# Altium PCB PCB1.pcbdoc
Units mil, origin at the board's own origin, x right, y up, seen from the top; angles counter-clockwise.
Board outline 1695 x 2542.13 mil, 2 copper layers (Top Layer, Bottom Layer); 9 components, 14 nets, 84 pads, 29 vias.
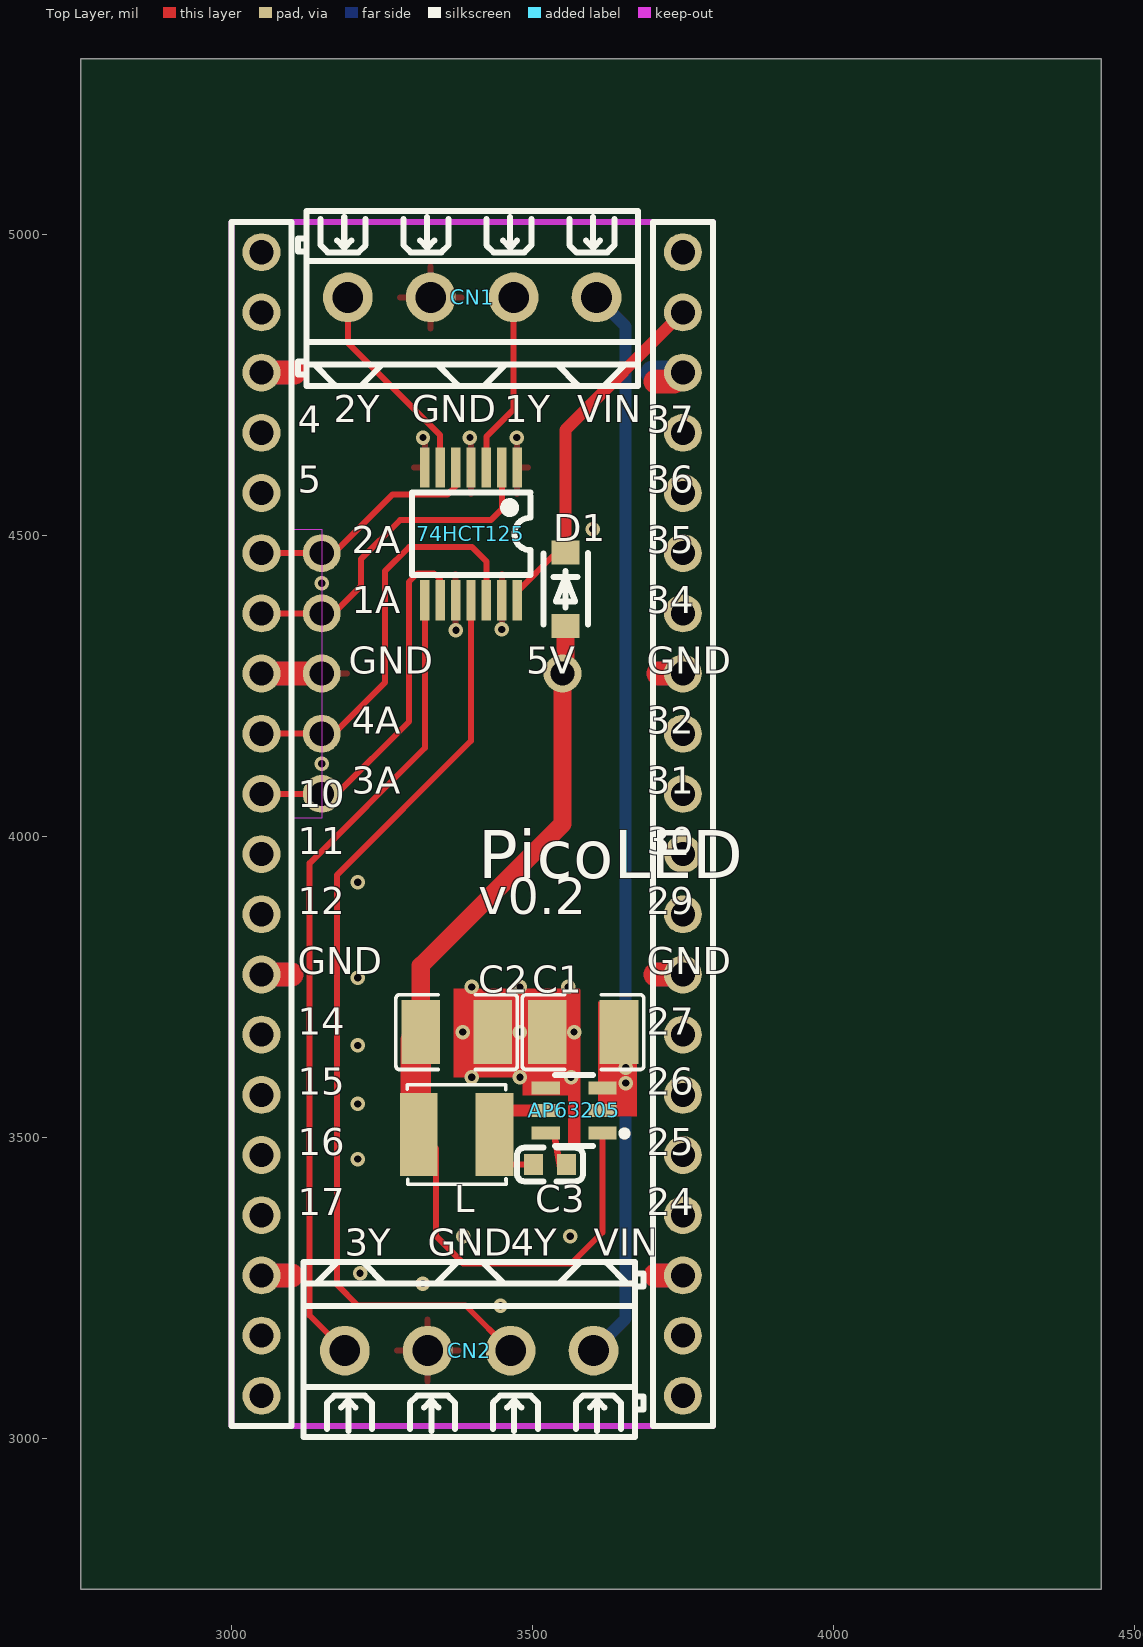
[diagram p0: Top Layer view]
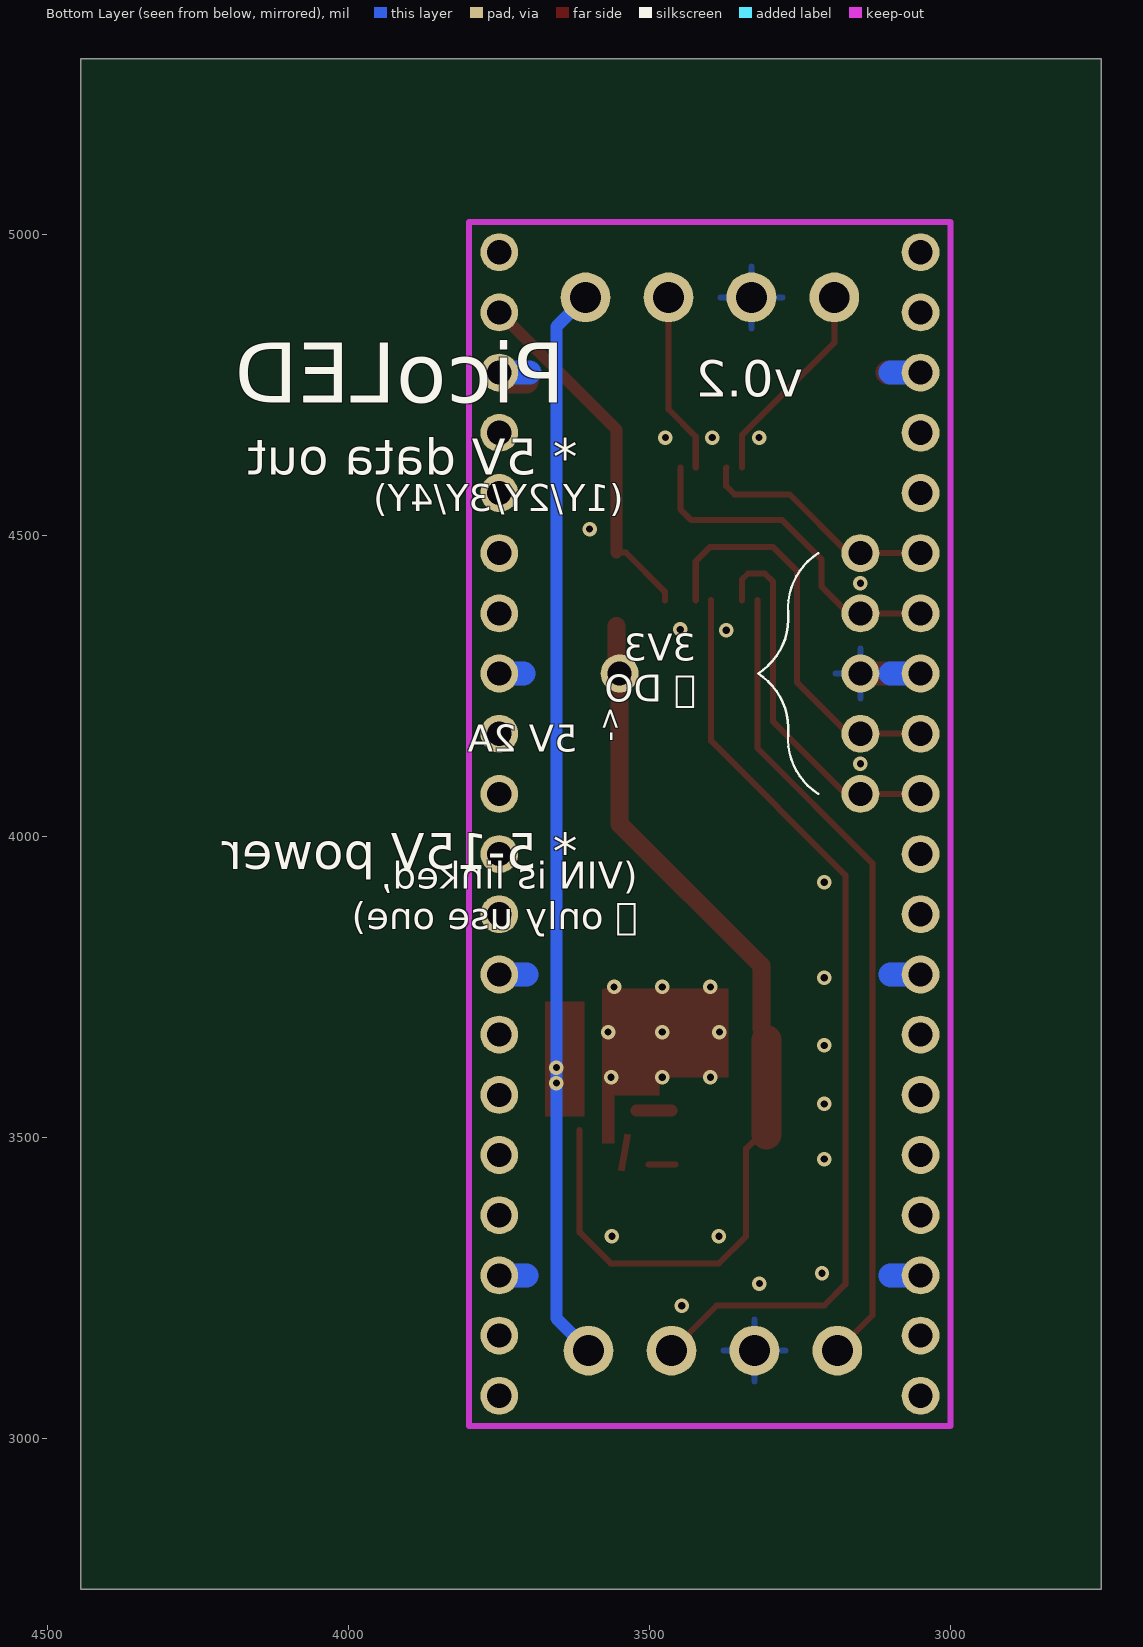
[diagram p1: Bottom Layer view, seen from below]

## Layer stack, top to bottom
Top Layer: signal copper (thickness not stored)
Dielectric: dielectric 12.6, FR-4, Dk 4.8
Bottom Layer: signal copper (thickness not stored)

## Board outline
4445,2750 2750,2750 2750,5292.13 4445,5292.13

## Design rules (kind name [scope] priority, off if disabled: settings)
BoardOutlineClearance copperThickness1oz [All] p0: genericclearance=10 ignorepadtopadclearanceinfootprint=FALSE except(0: Arc-SplitContinuation Track-SplitContinuation SMDPad-SplitContinuation THPad-SplitContinuation Via-SplitContinuation Fill-SplitContinuation Poly-SplitContinuation Region-SplitContinuation Text-SplitContinuation; 6: Track-CutoutEdge SMDPad-CutoutEdge THPad-CutoutEdge Via-CutoutEdge Region-CutoutEdge; 11.8: Track-OutlineEdge SMDPad-OutlineEdge THPad-OutlineEdge Via-OutlineEdge Fill-OutlineEdge Region-OutlineEdge Poly-OutlineEdge Text-OutlineEdge Fill-CutoutEdge)
BoardOutlineClearance copperThickness2oz [All] p0: genericclearance=10 ignorepadtopadclearanceinfootprint=FALSE except(0: Arc-SplitContinuation Track-SplitContinuation SMDPad-SplitContinuation THPad-SplitContinuation Via-SplitContinuation Fill-SplitContinuation Poly-SplitContinuation Region-SplitContinuation Text-SplitContinuation; 6: Track-CutoutEdge SMDPad-CutoutEdge THPad-CutoutEdge Via-CutoutEdge Region-CutoutEdge; 11.8: Track-OutlineEdge SMDPad-OutlineEdge THPad-OutlineEdge Via-OutlineEdge Fill-OutlineEdge Region-OutlineEdge Poly-OutlineEdge Text-OutlineEdge Fill-CutoutEdge)
Clearance copperThickness1oz [(InNet('GND') OR InNet('+5V') OR InNet('$1N476') OR InNet('1A') OR InNet('2A') OR InNet('1Y') OR InNet('2Y') OR InNet('3Y') OR InNet('3A') OR InNet('4Y') OR InNet('4A') OR InNet('SW') OR InNet('VIN') OR InNet('VSYS'))] p1: gap=7 ignorepadtopadclearanceinfootprint=FALSE except(4: Track-Track; 6: Track-SMDPad SMDPad-SMDPad Track-THPad SMDPad-THPad THPad-THPad Track-Via SMDPad-Via THPad-Via Via-Via SMDPad-Fill THPad-Fill Via-Fill Fill-Fill Track-Region SMDPad-Region THPad-Region Via-Region Region-Region Track-Poly SMDPad-Poly THPad-Poly Via-Poly Fill-Poly Region-Poly Poly-Poly Track-Text SMDPad-Text THPad-Text Via-Text Fill-Text Region-Text Poly-Text Text-Text; 6.9: Track-Hole SMDPad-Hole THPad-Hole Via-Hole Fill-Hole Region-Hole Poly-Hole Text-Hole Sheet-Hole; 11.8: Track-Fill Fill-Region Track-Sheet SMDPad-Sheet THPad-Sheet Via-Sheet Fill-Sheet Region-Sheet Poly-Sheet Text-Sheet)
Clearance copperThickness2oz [All] p1: gap=7 ignorepadtopadclearanceinfootprint=FALSE except(6: Track-SMDPad SMDPad-SMDPad Track-THPad SMDPad-THPad THPad-THPad Track-Via SMDPad-Via THPad-Via Via-Via SMDPad-Fill THPad-Fill Via-Fill Fill-Fill Track-Region SMDPad-Region THPad-Region Via-Region Region-Region Track-Poly SMDPad-Poly THPad-Poly Via-Poly Fill-Poly Region-Poly Poly-Poly Track-Text SMDPad-Text THPad-Text Via-Text Fill-Text Region-Text Poly-Text Text-Text; 6.9: Track-Hole SMDPad-Hole THPad-Hole Via-Hole Fill-Hole Region-Hole Poly-Hole Text-Hole Sheet-Hole; 8: Track-Track; 11.8: Track-Fill Fill-Region Track-Sheet SMDPad-Sheet THPad-Sheet Via-Sheet Fill-Sheet Region-Sheet Poly-Sheet Text-Sheet)
DiffPairsRouting differentialPair [All] p1: maxuncoupledlength=10 minlimit=6 maxlimit=6 mostfreqgap=6 toplayer_minwidth=5 toplayer_prefwidth=10 toplayer_maxwidth=100 bottomlayer_minwidth=5 bottomlayer_prefwidth=10 bottomlayer_maxwidth=100
PasteMaskExpansion pasteMaskExpansion [All] p1: expansion=0
PlaneConnect innerPlane [All] p1: planeconnectstyle=Relief reliefexpansion=20 reliefentries=4 reliefconductorwidth=10 reliefairgap=10
PolygonConnect copperRegion [All] p1: connectstyle=Relief reliefentries=4 reliefconductorwidth=10 polygonreliefangle="90 Angle" airgapwidth=10
RoutingVias viaSize [All] p1: viastyle="Through Hole" holewidth=12.0078 minholewidth=11.811 maxholewidth=248.0314 width=24.0158 minwidth=19.685 maxwidth=393.7008
SolderMaskExpansion solderMaskExpansion [All] p1: useseparateexpansions=TRUE expansion=2 expansionbottom=2
Width copperThickness1oz [All] p1: maxlimit=100 minlimit=5 preferedwidth=10
Width copperThickness2oz [All] p1: maxlimit=100 minlimit=8 preferedwidth=10

## Components (designator, comment, footprint, x,y, rotation, side; value= is the part's Value field where it differs from the comment)
74HCT125 "={Manufacturer Part}" TSSOP-14_L5.0-W4.4-P0.65-LS6.4-BL 3398,4503.06 r180 top
AP63205 "={Manufacturer Part}" TSOT-23-6_L2.9-W1.6-P0.95-LS2.8-BL 3569.22,3545.29 r90 top
C1 "={Value}" C1210 3584.22,3675.29 r0 top
C2 "={Value}" C1210 3374.22,3675.29 r180 top
C3 "={Value}" C0603 3529.22,3455.29 r0 top
CN1 "" CONN-TH_DB125-3.5-4P-GN 3400,4896.06 r180 top
CN2 "" CONN-TH_DB125-3.5-4P-GN 3395,3146.06 r0 top
D1 "" SOD-123F_L2.8-W1.8-LS3.7-RD 3555,4411.06 r270 top
L "={Value}" IND-SMD_L4.0-W4.0 3374.22,3505.29 r180 top

## Footprints (in the part's own frame and the unit in brackets; to place one, negate y for a bottom-side part, rotate by r counter-clockwise, add the part's x,y. Pads: shape width x height; smd on the part's side, far side on the other; paste and mask are expansions set on the pad)
C0603 [mm]
  rect 0.8x0.9 smd: 1(-0.7,0) 2(0.7,0)
  silkscreen extent -1.39,-0.71 1.39,0.71
C1210 [mm]
  rect 1.635x2.7 smd: 1(-1.517,0) 2(1.517,0)
  silkscreen extent -2.56,-1.58 2.56,1.58
CONN-TH_DB125-3.5-4P-GN [mm]
  round 2.1 hole 1.3: 1(-5.25,0) 2(-1.75,0) 3(1.75,0) 4(5.25,0)
  silkscreen extent -7,-3.65 7.35,3.75
IND-SMD_L4.0-W4.0 [mm]
  rect 1.6x3.5 smd: 1(-1.6,0) 2(1.6,0)
  silkscreen extent -2.08,-2.1 2.08,2.1
SOD-123F_L2.8-W1.8-LS3.7-RD [mm]
  rect 1x1.2 smd: 1(-1.55,0) 2(1.55,0)
  silkscreen extent -1.52,-0.93 1.49,0.95
TSOT-23-6_L2.9-W1.6-P0.95-LS2.8-BL [mm]
  rect 0.55x1.2 smd: 1(-0.95,-1.2) 2(0,-1.2) 3(0.95,-1.2) 4(0.95,1.2) 5(0,1.2) 6(-0.95,1.2)
  silkscreen extent -1.5,-2.25 1.5,0.8
TSSOP-14_L5.0-W4.4-P0.65-LS6.4-BL [mm]
  rect 0.4x1.7 smd: 1(-1.95,-2.8) 2(-1.3,-2.8) 3(-0.65,-2.8) 4(0,-2.8) 5(0.65,-2.8) 6(1.3,-2.8) 7(1.95,-2.8) 8(1.95,2.8) 9(1.3,2.8) 10(0.65,2.8) 11(0,2.8) 12(-0.65,2.8) 13(-1.3,2.8) 14(-1.95,2.8)
  silkscreen extent -2.51,-1.74 2.5,1.74

## Free pads (board coordinates)
  round 63 hole 40: 1(3050,4971.06) 1(3150,4071.06) 1(3150,4171.06) 1(3150,4271.06) 1(3150,4371.06) 1(3150,4471.06) 2(3050,4871.06) 3(3050,4771.06) 4(3050,4671.06) 5(3050,4571.06) 5V(3550,4271.06) 6(3050,4471.06) 7(3050,4371.06) 8(3050,4271.06) 9(3050,4171.06) 10(3050,4071.06) 11(3050,3971.06) 12(3050,3871.06) 13(3050,3771.06) 14(3050,3671.06) 15(3050,3571.06) 16(3050,3471.06) 17(3050,3371.06) 18(3050,3271.06) 19(3050,3171.06) 20(3050,3071.06) 20(3750,3071.06) 21(3750,3171.06) 23(3750,3271.06) 24(3750,3371.06) 25(3750,3471.06) 26(3750,3571.06) 27(3750,3671.06) 28(3750,3771.06) 29(3750,3871.06) 30(3750,3971.06) 31(3750,4071.06) 32(3750,4171.06) 33(3750,4271.06) 34(3750,4371.06) 35(3750,4471.06) 36(3750,4571.06) 37(3750,4671.06) 38(3750,4771.06) 39(3750,4871.06) 40(3750,4971.06)

## Via types
v1: diameter 24.02, hole 12.01, Top Layer to Bottom Layer, 29 vias

## Nets (pads, with @x,y where several pads share a name; then routed paths per layer and width w, separated by ;. In a path a pad name is that pad's centre, name@x,y a point inside that pad or via, vN(x,y) a via of type N, cw(c..) or ccw(c..) an arc to the next point about the centre after c; other vN are vias at no path point)
1A: 74HCT125.2 pad.1@3150,4371.06 pad.7 | length 546.3
  Top Layer w10: pad.7 pad.1@3150,4371.06 ; pad.1@3170,4371.06 3215,4416.06 3215,4461.06 3280,4526.06 3431,4526.06 3449.18,4544.24 74HCT125.2
1Y: 74HCT125.3 CN1.2 | length 301.5
  Top Layer w10: 74HCT125.3 3423.59,4664.65 3468.9,4709.96 CN1.2
2A: 74HCT125.5 pad.1@3150,4471.06 pad.6 | length 380.1
  Top Layer w10: pad.6 pad.1@3150,4471.06 ; pad.1@3170,4471.06 3267.79,4568.85 3359.24,4568.85 3373,4582.61 3373,4612.71 74HCT125.5
2Y: 74HCT125.6 CN1.4 | length 346.3
  Top Layer w10: CN1.4 3193.31,4820.56 3346.82,4667.05 74HCT125.6
3A: 74HCT125.9 pad.1@3150,4071.06 pad.10 | length 603.2
  Top Layer w10: pad.10 pad.1@3150,4071.06 ; pad.1@3170,4071.06 3175,4071.06 3295,4191.06 3295,4423.47 3308.81,4437.27 3336.82,4437.27 3346.82,4427.27 74HCT125.9
3Y: 74HCT125.8 CN2.1 | length 1350.1
  Top Layer w10: CN2.1 3130,3204.37 3130,3956.06 3321.23,4147.29 74HCT125.8
4A: 74HCT125.12 pad.1@3150,4171.06 pad.9 | length 664.8
  Top Layer w10: pad.9 pad.1@3150,4171.06 ; pad.1@3170,4171.06 3255,4256.06 3255,4441.06 3295,4481.06 3400,4481.06 3423.59,4457.47 74HCT125.12
4Y: 74HCT125.11 CN2.3 | length 1563.6
  Top Layer w10: 74HCT125.11 3398,4159.06 3175,3936.06 3175,3256.06 3210,3221.06 3388.9,3221.06 CN2.3
$1N476: AP63205.6 C3.2
+5V: AP63205.1 C2.2 D1.2 L.2 pad.5V | length 1599.3
  Top Layer w10: L.2@3311.23,3510.29 3340,3481.52 3340,3336.06 3385,3291.06 3565,3291.06 3616.47,3342.53 AP63205.1@3616.47,3512.89
  Top Layer w30: C2.2@3314.48,3680.29 3314.48,3785.55 3550,4021.06 pad.5V 3555,4276.06 D1.2
  Top Layer w50: L.2@3306.23,3505.29 C2.2@3306.23,3662.3
GND: 74HCT125.1 74HCT125.4 74HCT125.7 74HCT125.10 74HCT125.13 AP63205.4 C1.1 C2.1 CN1.3 CN2.2 pad.1@3150,4271.06 pad.3 pad.8 pad.13 pad.18 pad.23 pad.28 pad.33 pad.38 | length 815.8
  Top Layer w40: pad.18 3100,3271.06 ; pad.13 3100,3771.06 ; pad.8 pad.1@3150,4271.06 ; pad.3 3105,4771.06 ; 3705,3271.06 pad.23 ; 3705,3771.06 pad.28 ; 3705,4756.06 3735,4756.06 pad.38 ; 3710,4271.06 pad.33
  Bottom Layer w40: pad.18 3100,3271.06 ; pad.13 3100,3771.06 ; pad.8 3100,4271.06 ; pad.3 3100,4771.06 ; 3700,4771.06 pad.38 ; 3705,3271.06 pad.23 ; 3705,3771.06 pad.28 ; 3710,4271.06 3733.28,4271.06 3733.57,4271.35 pad.33@3749.43,4271.35
  other v1: 3446.99,3220.47 3317.84,3257.42 3213.78,3274.65 3385,3336.06 3562.85,3336.06 3210,3464.4 3210,3556.06 3399.22,3600.29 3479.22,3600.29 3564.22,3600.29 3210,3653.16 3384.22,3675.29 3479.22,3675.29 3569.22,3675.29 3399.22,3750.29 3479.22,3750.29 3559.22,3750.29 3210,3765.5 3210,3924.34 3150,4121.06 3373,4343.06 3449.24,4344.31 3150,4421.06 3600,4511.06 3318.29,4663.06 3396.23,4663.06 3474,4663.06
SW: AP63205.5 C3.1 L.1 | length 102.2
  Top Layer w10: L.1@3457.21,3455.29 C3.1
  Top Layer w20: L.1@3464.22,3545.29 AP63205.5
VIN: AP63205.2 AP63205.3 C1.2 CN1.1 CN2.4 | length 1792.1
  Bottom Layer w20: CN2.4 3655,3199.37 v1(3655,3590.56) v1(3655,3616.39) 3655,4847.75 CN1.1
VSYS: 74HCT125.14 D1.1 pad.39 | length 601.1
  Top Layer w10: 74HCT125.14 3474.77,4406.97 3539.89,4472.08 D1.1
  Top Layer w20: D1.1 3555,4676.06 pad.39

## Polygon pours and split planes (outlines as drawn)
GND on Bottom Layer (solid, remove dead copper, pour order 2): 3100,5011.06 3700,5011.06 3700,3031.06 3100,3031.06
GND on Top Layer (solid, remove dead copper, pour order 0): 3100,3031.06 3700,3031.06 3700,5011.06 3100,5011.06

## Keep-outs
Top Layer:
  region: 3100,4511.06 3150,4511.06 3150,4030.64 3100,4030.64
Board Outline Layer:
  lines w10: 3000,3021.06 3800,3021.06 3800,5021.06 3000,5021.06 3000,3021.06

## Other copper
Top Layer:
  region net VIN: 3673.39,3535.29 3609.22,3535.29 3609.22,3725.68 3673.39,3725.68
  region net $1N476: 3552.08,3445.73 3542.24,3444 3531.55,3504.57 3541.4,3506.31
  region net GND: 3579.22,3490.29 3559.22,3490.29 3559.22,3570.29 3484.22,3570.29 3484.22,3599.89 3369.22,3599.89 3369.22,3746.96 3577.54,3746.96 3579.22,3745.29

## Silkscreen, mask and mechanical layers (free items; w line width, h text height)
Top Silkscreen Layer:
  lines w10: 3000,3021.06 3100,3021.06 3100,5021.06 3000,5021.06 3000,3021.06 ; 3700,3021.06 3800,3021.06 3800,5021.06 3700,5021.06 3700,3021.06
  text "2Y" at 3169.65,4688.56 h45
  text "GND" at 3299.65,4688.56 h45
  text "1Y" at 3453.6,4688.56 h45
  text "VIN" at 3574.65,4688.56 h45
  text "4" at 3110,4671.06 h45
  text "37" at 3690,4671.06 h45
  text "5" at 3110,4571.06 h45
  text "36" at 3690,4571.06 h45
  text "2A" at 3200,4471.06 h45
  text "35" at 3690,4471.06 h45
  text "1A" at 3200,4371.06 h45
  text "34" at 3690,4371.06 h45
  text "GND" at 3195,4271.06 h45
  text "5V" at 3490,4271.06 h45
  text "GND" at 3690,4271.06 h45
  text "4A" at 3200,4171.06 h45
  text "32" at 3690,4171.06 h45
  text "3A" at 3200,4071.06 h45
  text "31" at 3690,4071.06 h45
  text "10" at 3110,4048.56 h45
  text "11" at 3110,3971.06 h45
  text "30" at 3690,3971.06 h45
  text "PicoLED" at 3410,3931.06 h80
  text "12" at 3110,3871.06 h45
  text "v0.2" at 3410,3871.06 h60
  text "29" at 3690,3871.06 h45
  text "GND" at 3110,3771.06 h45
  text "GND" at 3690,3771.06 h45
  text "14" at 3110,3671.06 h45
  text "27" at 3690,3671.06 h45
  text "15" at 3110,3571.06 h45
  text "26" at 3690,3571.06 h45
  text "16" at 3110,3471.06 h45
  text "25" at 3690,3471.06 h45
  text "17" at 3110,3371.06 h45
  text "24" at 3690,3371.06 h45
  text "3Y" at 3188.3,3303.56 h45
  text "GND" at 3326.1,3303.56 h45
  text "4Y" at 3463.9,3303.56 h45
  text "VIN" at 3601.7,3303.56 h45
Bottom Silkscreen Layer:
  lines w4: 3220,4071.06 ccw(c3161.79,4162.67) 3270,4171.06 cw(c3378.21,4179.46) 3320,4271.06 cw(c3378.21,4362.67) 3270,4371.06 ccw(c3161.79,4379.46) 3220,4471.06
  text "v0.2" at 3245,4731.06 h60
  text "PicoLED" at 3640,4721.06 h100
  text "* 5V data out" at 3620,4601.06 h60
  text "(1Y/2Y/3Y/4Y)" at 3543.35,4541.06 h45
  text "3V3 /   DO" at 3423.06,4224.57 h45
  text "<-" at 3550,4216.06 h35 r270
  text "5V 2A" at 3620,4141.06 h45
  text "* 5-15V power" at 3620,3946.06 h60
  text "(VIN is linked, /   only use one)" at 3520,3846.06 h45